# Altium PCB uMultimeter_ExpProbeA_Pcb.PcbDoc
Units mil, origin at the board's own origin, x right, y up, seen from the top; angles counter-clockwise.
Board outline 770 x 1250 mil, 2 copper layers (Top Layer, Bottom Layer); 7 components, 21 nets, 31 pads, 2 vias.
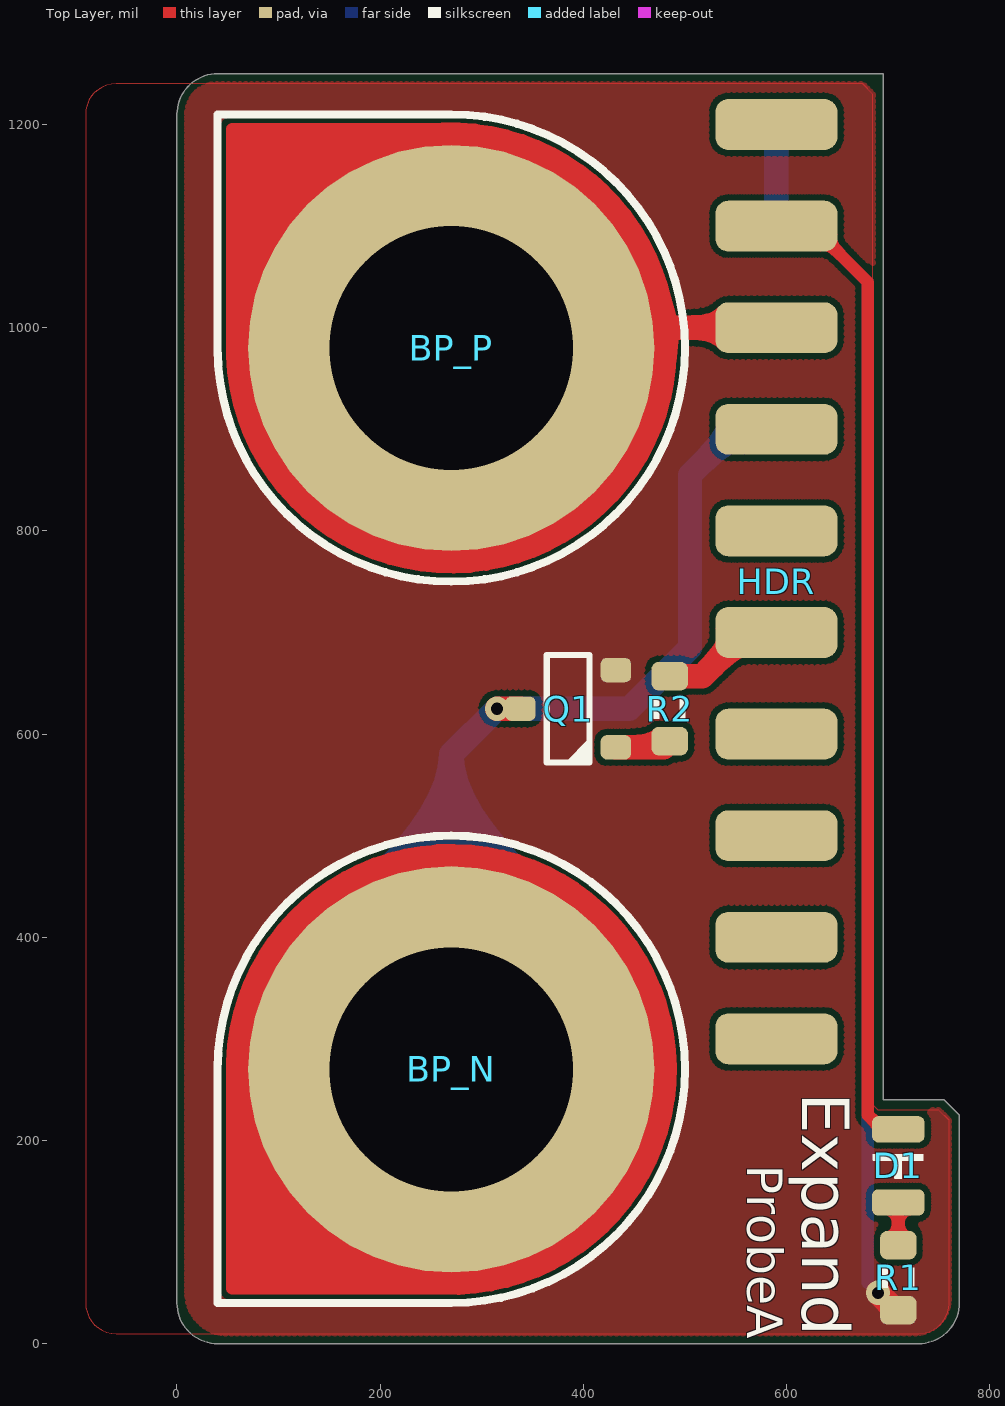
[diagram p0: Top Layer view]
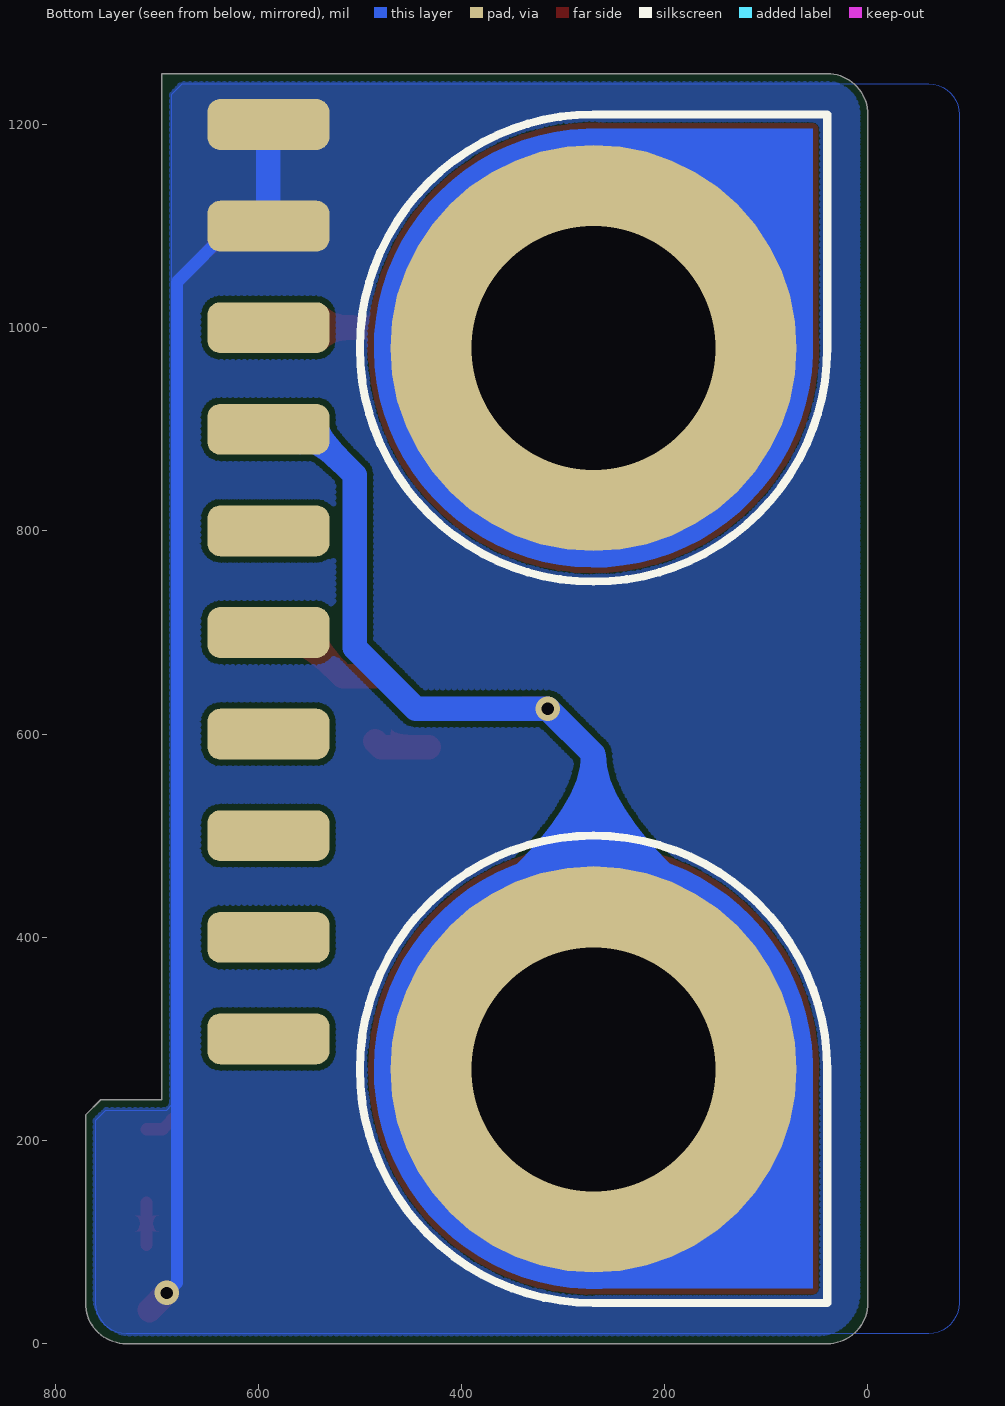
[diagram p1: Bottom Layer view, seen from below]
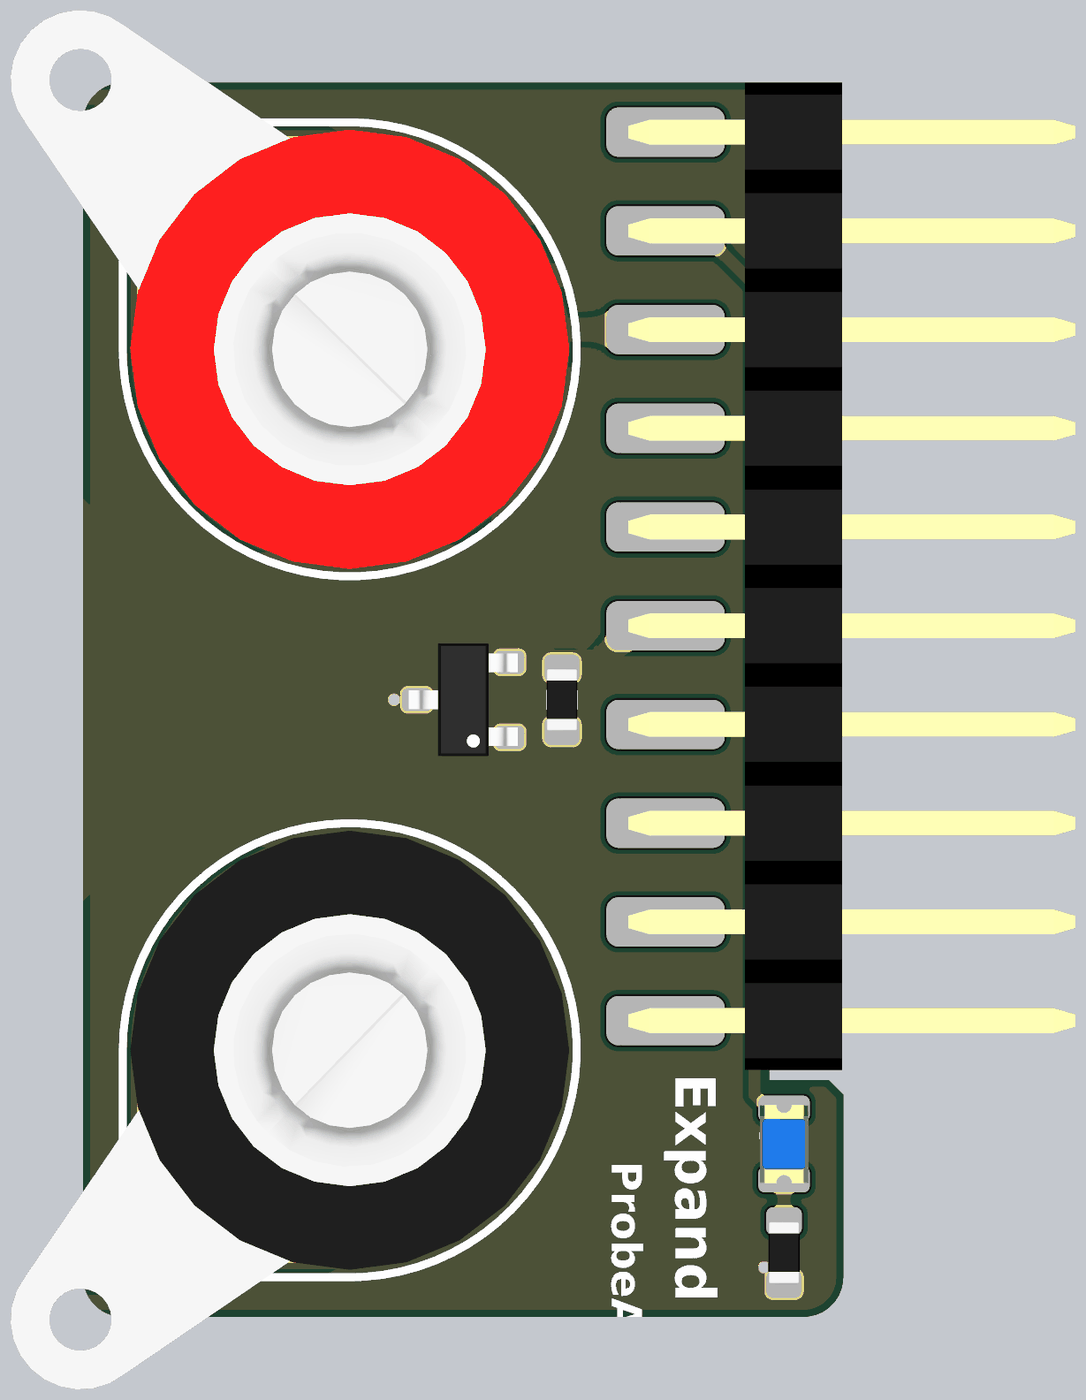
[diagram p2: 3D render of the assembled board from above, using the file's embedded part models]

## Layer stack, top to bottom
Top Solder: solder mask 0.4, Solder Resist, Dk 3.5
Top Layer: signal copper 1.4
Dielectric1: dielectric 12.6, FR-4, Dk 4.8
Bottom Layer: signal copper 1.4
Bottom Solder: solder mask 0.4, Solder Resist, Dk 3.5

## Board outline
0,40 ccw(c40,40) 40,0 730,0 ccw(c730,40) 770,40 770,225 755,240 695,240 695,1250 40,1250 ccw(c40,1210) 0,1210

## Design rules (kind name [scope] priority, off if disabled: settings)
Clearance ClearancePolygon [InPolygon] p1: gap=6
Clearance [All] p2: gap=6
ComponentClearance [All] p1: gap=0 collisioncheckmode=3 verticalgap=0 showdistances=FALSE
Height [All] p1: minheight=0 maxheight=5000 prefheight=500
HoleSize [All] p1: absolutevalues=TRUE maxlimit=200 minlimit=1 maxpercent=80.000 minpercent=20.000
HoleToHoleClearance [All] p1: gap=6 allowstackedmicrovias=TRUE
MinimumSolderMaskSliver [All] p1: minsoldermaskwidth=4
PlaneConnect [All] p1: planeconnectstyle=Direct reliefexpansion=20 reliefentries=4 reliefconductorwidth=20 reliefairgap=10
PolygonConnect [All] p1: connectstyle=Direct reliefconductorwidth=20 reliefentries=4 polygonreliefangle="90 Angle" airgapwidth=10
RoutingVias [All] p1: holewidth=12 width=20 viastyle="Through Hole" minholewidth=12 minwidth=20 maxholewidth=100 maxwidth=200
SilkToSilkClearance [All] p1: silktosilkclearance=0
SilkToSolderMaskClearance SilkscreenOverComponentPads [IsPad] p1: minsilkscreentomaskgap=1 clearancetoexposedcopper=TRUE
SolderMaskExpansion [All] p1: expansion=2
Width [All] p1: maxlimit=64 minlimit=6 preferedwidth=10
22 further rules are at their usual default settings.

## Classes and differential pairs
component class EXP: HDR
component class uMultimeter_ExpProbeA_Sch: BP_N BP_P D1 Q1 R1 R2

## Components (designator, comment, footprint, x,y, rotation, side; value= is the part's Value field where it differs from the comment)
BP_N "BananaPlugs" BananaPlugs_Black 270,270 r225 top
BP_P "BananaPlugs" BananaPlugs_Red 270,980 r135 top
D1 "LED_0805" LED_0805_BLUE 710,175 r270 top
HDR "HDR2x10_2.54" HDR2X10_2.54_180H 590,1200 r0 top locked
Q1 "BJT_NPN" SOT23-3 385,625 r180 top
R1 "Res_0603" RES_0603 710,65 r270 top
R2 "Res_0603" RES_0603 485,625 r270 top

## Footprints (in the part's own frame and the unit in brackets; to place one, negate y for a bottom-side part, rotate by r counter-clockwise, add the part's x,y. Pads: shape width x height; smd on the part's side, far side on the other; paste and mask are expansions set on the pad)
BananaPlugs_Black [mil]
  round 400 hole 240: 1(0,0)
  Top Layer region: 158.64,-146.59 73.2,-203.22 -28.73,-214.08 -124.19,-176.73 -191.68,-99.58 -216,0 -191.68,99.58 -124.19,176.73 -28.73,214.08 73.2,203.22 158.64,146.59 158.64,146.59 159,146 305,0
  Top Layer lines w12: 158.64,-146.59 cw(c0,0) 158.64,146.59 ; 159,-146 305,0 159,146
  Bottom Layer region: 158.64,-146.59 73.2,-203.22 -28.73,-214.08 -124.19,-176.73 -191.68,-99.58 -216,0 -191.68,99.58 -124.19,176.73 -28.73,214.08 73.2,203.22 158.64,146.59 158.64,146.59 159,146 305,0
  silkscreen extent -230,-230 325,230, body extent -222,-222 457,222, height 327
BananaPlugs_Red [mil]
  round 400 hole 240: 1(0,0)
  Top Layer region: 158.64,-146.59 73.2,-203.22 -28.73,-214.08 -124.19,-176.73 -191.68,-99.58 -216,0 -191.68,99.58 -124.19,176.73 -28.73,214.08 73.2,203.22 158.64,146.59 158.64,146.59 159,146 305,0
  Top Layer lines w12: 158.64,146.59 ccw(c0,0) 158.64,-146.59 ; 159,146 305,0 159,-146
  Bottom Layer region: 158.64,-146.59 73.2,-203.22 -28.73,-214.08 -124.19,-176.73 -191.68,-99.58 -216,0 -191.68,99.58 -124.19,176.73 -28.73,214.08 73.2,203.22 158.64,146.59 158.64,146.59 159,146 305,0
  silkscreen extent -230,-230 325,230, body extent -222,-222 457,222, height 327
HDR2X10_2.54_180H [mil]
  rrect50% 120x50 smd: 1(0,0) 3(0,-100) 5(0,-200) 7(0,-300) 9(0,-400) 11(0,-500) 13(0,-600) 15(0,-700) 17(0,-800) 19(0,-900)
  rrect50% 120x50 smd far side: 2(0,0) 4(0,-100) 6(0,-200) 8(0,-300) 10(0,-400) 12(0,-500) 14(0,-600) 16(0,-700) 18(0,-800) 20(0,-900)
  body extent -38,-950 415,50, height 100
LED_0805_BLUE [mil]
  rrect50% 26x52 smd: 1(-36,0) 2(36,0)
  silkscreen extent -12,-25 12,24, body extent -40,-25 40,25, height 43
RES_0603 [mil]
  rrect50% 28x36 smd: 1(-32,0) 2(32,0)
  silkscreen extent -10,-16 10,16, body extent -31,-16 32,16, height 20
SOT23-3 [mil]
  rrect50% 30x24 smd: 1(-47,38) 2(-47,-38) 3(47,0)
  silkscreen extent -21,-53 21,53, body extent -55,-57 55,57, height 51

## Part data
D1: "LED"
HDR: "Header"
Q1: "Transistor"
R1 R2: "Resistor"

## Via types
v1: diameter 24, hole 12, Top Layer to Bottom Layer, 2 vias

## Nets (pads, with @x,y where several pads share a name; then routed paths per layer and width w, separated by ;. In a path a pad name is that pad's centre, name@x,y a point inside that pad or via, vN(x,y) a via of type N, cw(c..) or ccw(c..) an arc to the next point about the centre after c; other vN are vias at no path point)
3V3: D1.1 HDR.3 | length 968.6
  Top Layer w12: HDR.3 625,1100 680,1045 680,225 694,211 D1.1
5V: HDR.1
GND: HDR.2 HDR.4 Q1.2 R1.2 | length 1271
  Top Layer w24: v1(690,50) R1.2@707,33
  Bottom Layer w12: HDR.4 625,1100 680,1045 680,60 v1(690,50)
  Bottom Layer w24: HDR.4@555,1100 HDR.4 HDR.2
NetD1_2: D1.2 R1.1 | length 42
  Top Layer w12: R1.1 D1.2
NetHDR_6: HDR.6
NetHDR_7: HDR.7
NetHDR_9: HDR.9
NetHDR_10: HDR.10
NetHDR_12: HDR.12
NetHDR_13: HDR.13
NetHDR_14: HDR.14
NetHDR_15: HDR.15
NetHDR_16: HDR.16
NetHDR_17: HDR.17
NetHDR_18: HDR.18
NetHDR_19: HDR.19
NetHDR_20: HDR.20
NetQ1_1: Q1.1 R2.2 | length 55.5
  Top Layer w24: Q1.1 479,587 R2.2
PROBE_N: BP_N.1 HDR.8 Q1.3 | length 885.1
  Top Layer w24: v1(315,625) Q1.3
  Bottom Layer w24: BP_N.1 270,580 v1(315,625) 445,625 505,685 505,855 550,900 HDR.8
PROBE_P: BP_P.1 HDR.5 | length 328.3
  Top Layer w24: BP_P.1 290,1000 485.07,1000 HDR.5
SW: HDR.11 R2.1 | length 122.8
  Top Layer w24: R2.1 517,657 560,700 HDR.11

## Polygon pours and split planes (outlines as drawn)
GND on Top Layer "Top Layer-No Net" (hatched 45Degree grid 4 track 6, remove dead copper, pour order 6): 685,1230 675,1240 40,1240 ccw(c40,1210) 10,1210 10,50 ccw(c50,50) 50,10 725,10 ccw(c725,45) 760,45 760,220 750,230 695,230 690,230 685,235 685,1230
GND on Top Layer "Top Layer-No Net" (hatched 45Degree grid 4 track 6, remove dead copper, shelved, pour order 0): 685,1230 675,1240 -60,1240 ccw(c-60,1210) -90,1210 -90,40 ccw(c-60,40) -60,10 730,10 ccw(c730,40) 760,40 760,220 750,230 690,230 685,235
GND on Bottom Layer "Top Layer-No Net" (hatched 45Degree grid 4 track 6, remove dead copper, pour order 4): 685,1230 675,1240 40,1240 ccw(c40,1210) 10,1210 10,50 ccw(c50,50) 50,10 725,10 ccw(c725,45) 760,45 760,220 750,230 695,230 690,230 685,235 685,1230
GND on Bottom Layer "Top Layer-No Net" (hatched 45Degree grid 4 track 6, remove dead copper, shelved, pour order 2): 685,1230 675,1240 -60,1240 ccw(c-60,1210) -90,1210 -90,40 ccw(c-60,40) -60,10 730,10 ccw(c730,40) 760,40 760,220 750,230 690,230 685,235

## Silkscreen, mask and mechanical layers (free items; w line width, h text height)
Top Overlay:
  text "Expand" at 600,246.93 h80 r270
  text "ProbeA" at 549.56,175.93 h60 r270
Mechanical 1:
  the board outline again, w2